# Altium PCB Standard_Gimbal_v2.0.PcbDoc
Units mil, origin at the board's own origin, x right, y up, seen from the top; angles counter-clockwise.
Board outline 2952.76 x 3787.4 mil, 2 copper layers (Top Layer, Bottom Layer); 62 components, 64 nets, 265 pads, 41 vias.
Unrouted connection lines stored in the file: 1.
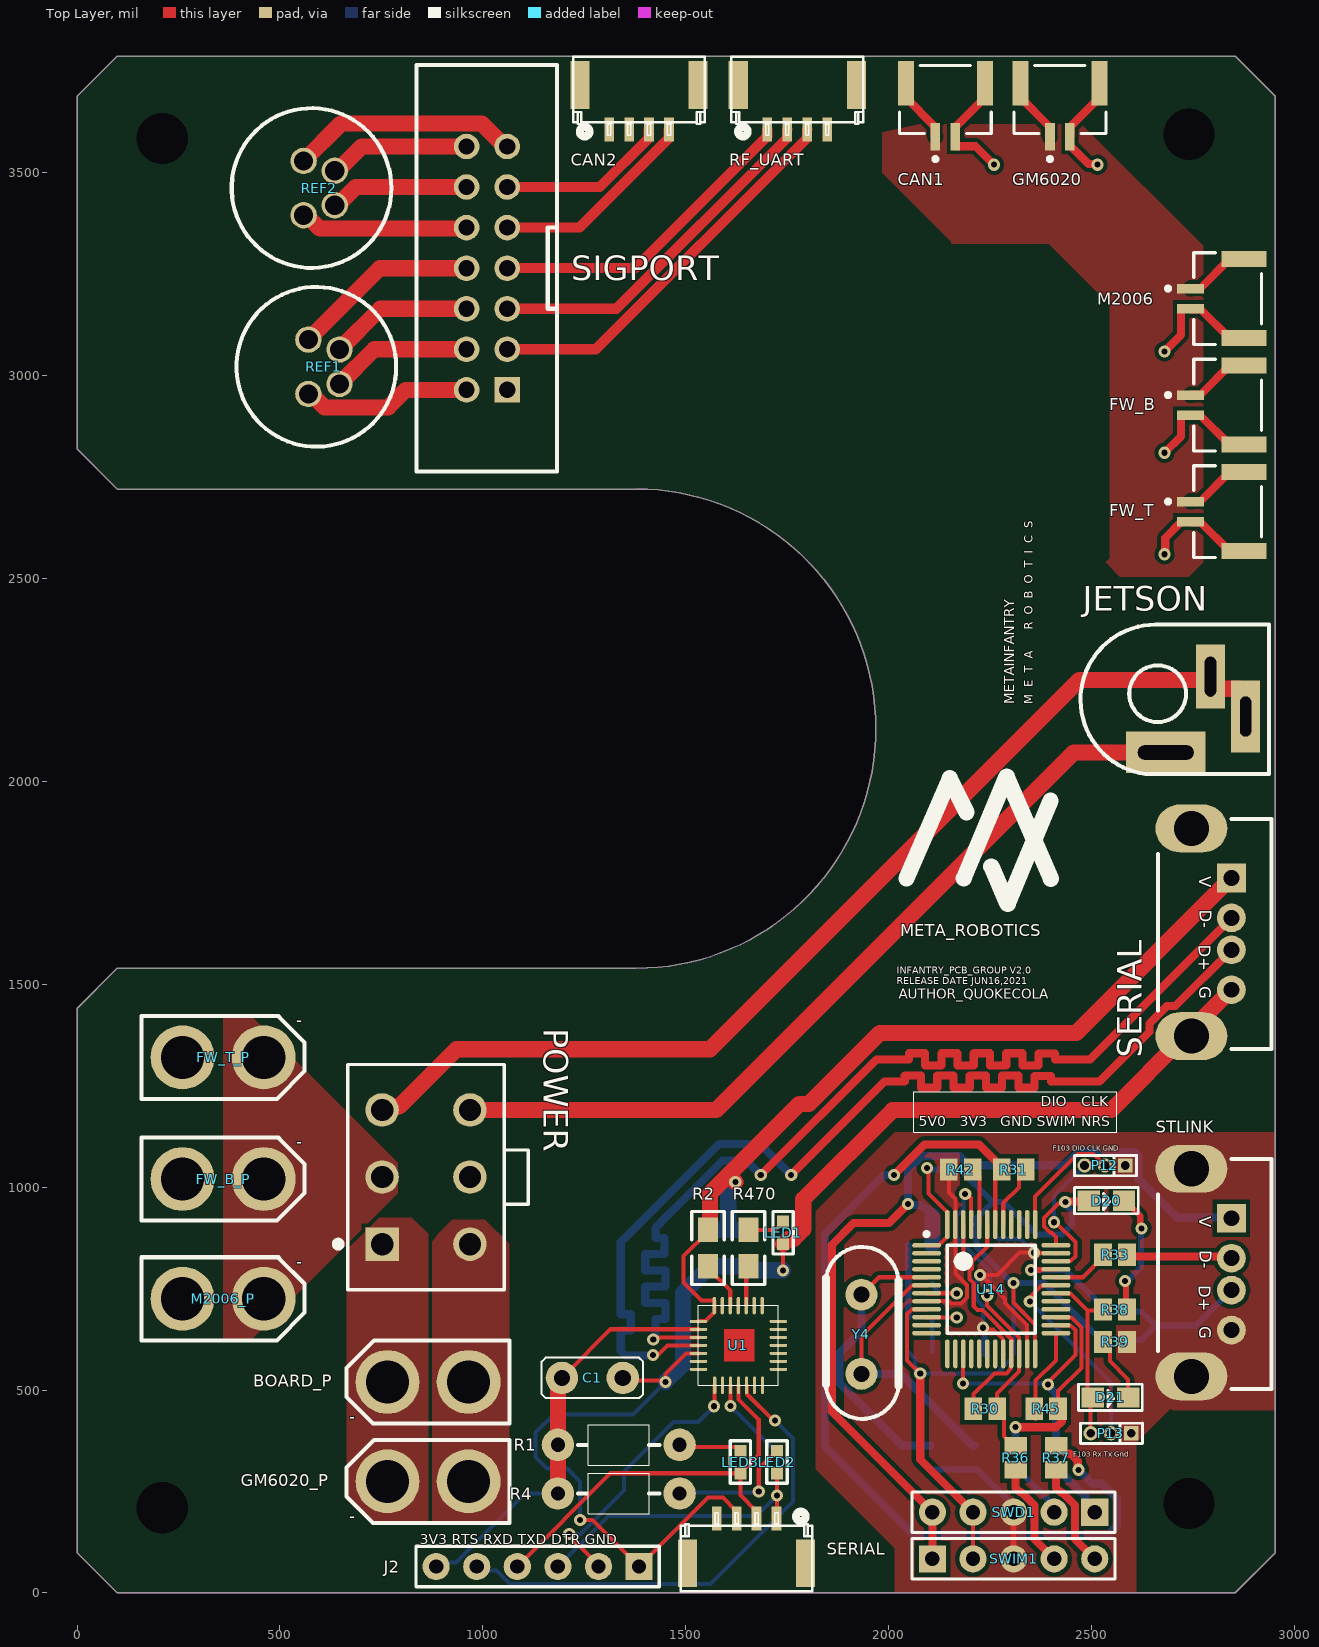
[diagram p0: Top Layer view]
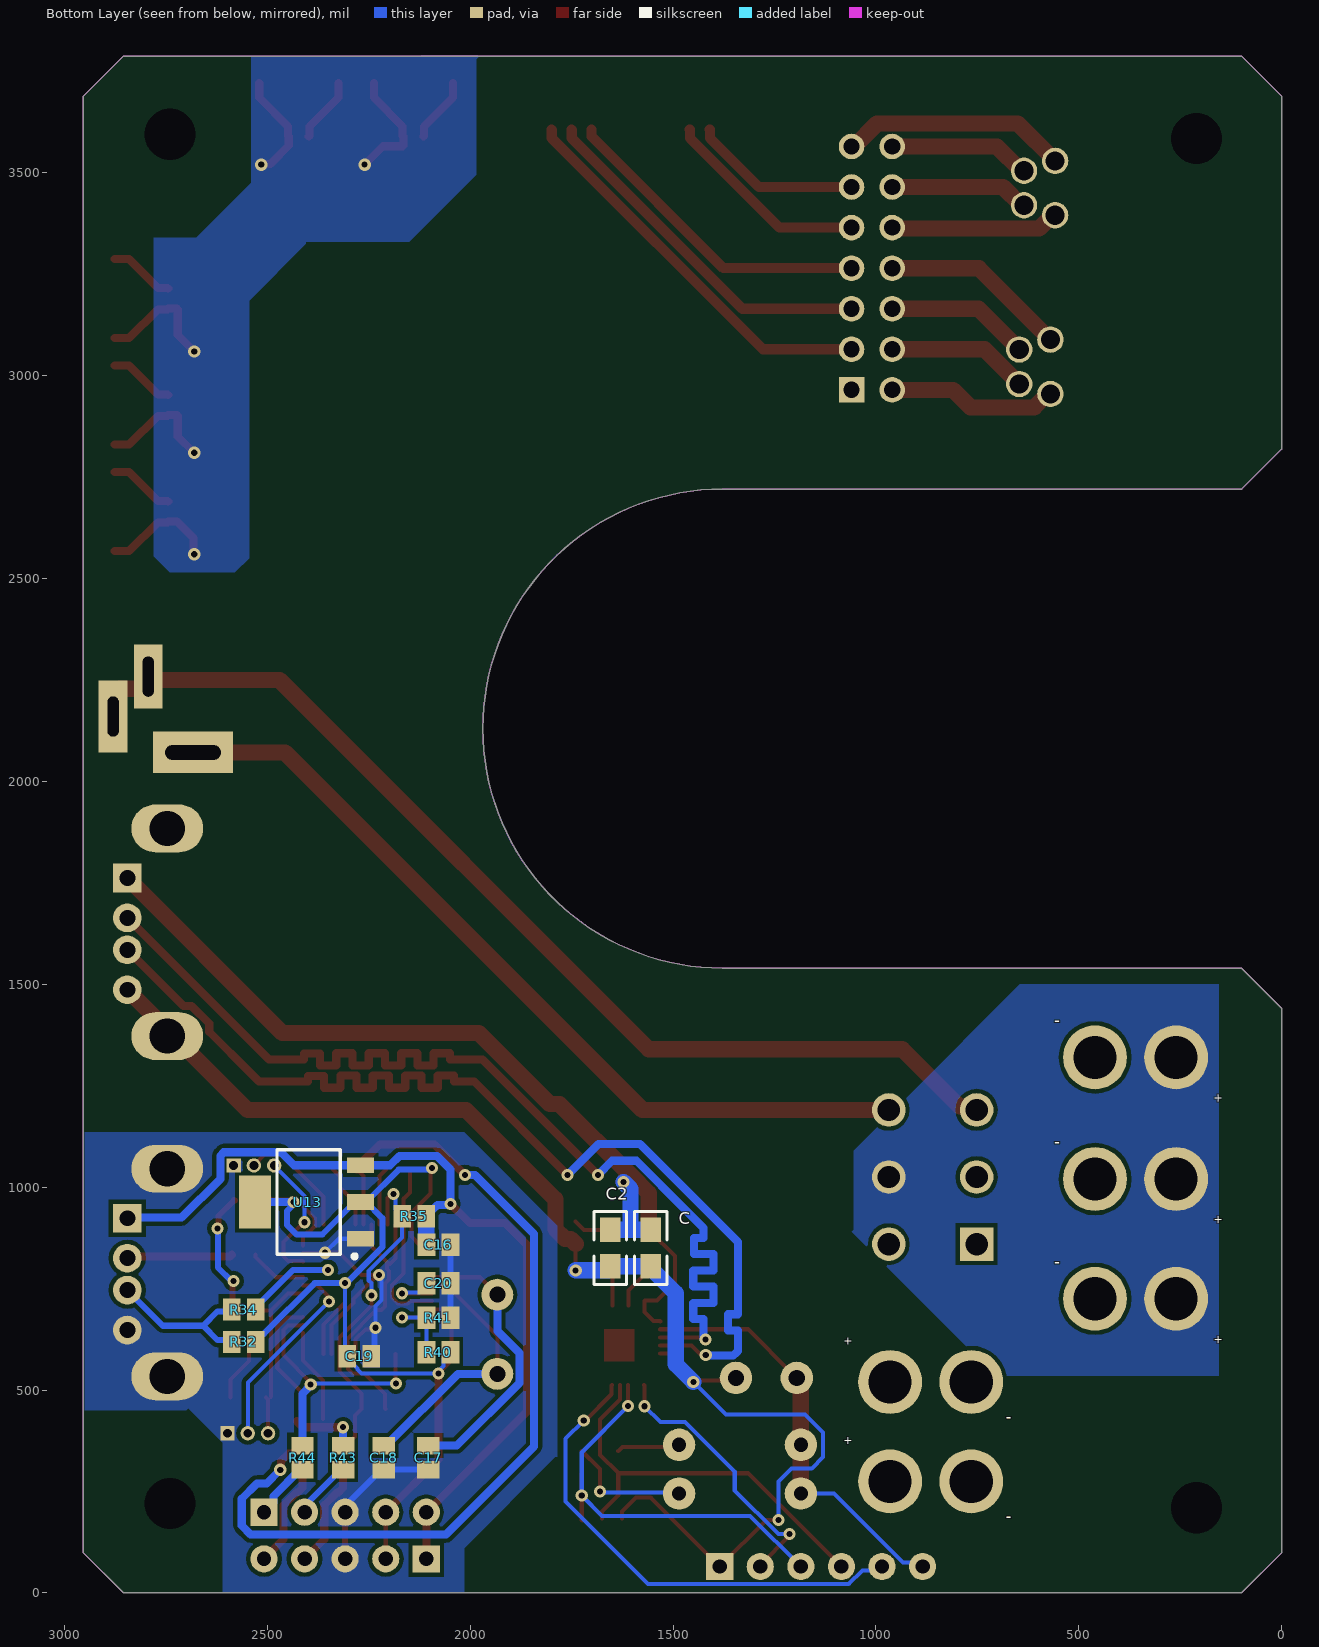
[diagram p1: Bottom Layer view, seen from below]

## Layer stack, top to bottom
Top Solder: solder mask 0.4, Solder Resist, Dk 3.5
Top Layer: signal copper 1.4
Dielectric 1: dielectric 12.6, FR-4, Dk 4.8
Bottom Layer: signal copper 1.4
Bottom Solder: solder mask 0.4, Solder Resist, Dk 3.5

## Board outline
0.25,98.68 0.25,1441.19 98.68,1539.62 1378.2,1539.62 ccw(c1378.2,2130.17) 1378.2,2720.72 98.68,2720.72 0.25,2819.15 0.25,3689.23 98.68,3787.65 2854.58,3787.65 2953.01,3689.23 2953.01,98.68 2854.58,0.25 98.68,0.25

## Design rules (kind name [scope] priority, off if disabled: settings)
Clearance [All] p1: gap=10 ignorepadtopadclearanceinfootprint=FALSE except(0: Arc-Hole Track-Hole SMDPad-Text SMDPad-Hole THPad-Text THPad-Hole Via-Text Via-Hole Fill-Text Fill-Hole Poly-Text Poly-Hole Region-Text Region-Hole Text-Text Text-Hole; 5: Arc-Arc Arc-Track Arc-THPad Arc-Via Arc-Text Track-Track Track-THPad Track-Via Track-Text SMDPad-SMDPad SMDPad-THPad SMDPad-Via THPad-THPad THPad-Via Via-Via; 7.5: Arc-SMDPad Track-SMDPad)
PlaneConnect [All] p1: planeconnectstyle=Direct reliefexpansion=20 reliefentries=4 reliefconductorwidth=10 reliefairgap=10
PolygonConnect [All] p1: connectstyle=Direct reliefconductorwidth=10 reliefentries=4 polygonreliefangle="90 Angle" airgapwidth=10
RoutingVias [All] p1: holewidth=28 width=50 viastyle="Through Hole" minholewidth=28 minwidth=50 maxholewidth=28 maxwidth=50
SolderMaskExpansion [All] p1: expansion=4 istentingtop=FALSE
Width [All] p1: maxlimit=40 minlimit=10 preferedwidth=20 minimp=50.000000 maximp=50.000000 favimp=50.000000
29 further rules are at their usual default settings.

## Components (designator, comment, footprint, x,y, rotation, side; value= is the part's Value field where it differs from the comment)
BOARD_P "XT PLUGIN" XT30-M 865,520 r180 top
C "Cap" 0805 1555,895 r270 bottom value=0.1uF
C1 "4.7" 2P-150 1270,530 r0 top value=1uF
C2 "Cap" 0805 1655,895 r270 bottom value=1uF
C16 "Cap" C0805 2078.11,858.47 r0 bottom value=104
C17 "Cap" C0805 2103.11,333.46 r90 bottom value=22p
C18 "Cap" C0805 2213.11,333.46 r90 bottom value=22p
C19 "Cap" C0805 2273.11,583.47 r0 bottom value=104
C20 "Cap" C0805 2078.11,763.47 r0 bottom value=104
CAN1 "CAN1" JST-BM02B-GHS-TBT_V 2140,3655 r0 top
CAN2 "gh1.25_4p" GH1.25-LS-4P 1385,3705 r180 top
D20 "LED" 0805_LED 2533.11,963.47 r0 top
D21 "LED" 0805_LED 2543.11,478.46 r0 top
FW_B "CAN1" JST-BM02B-GHS-TBT_V 2810,2927.5 r270 top
FW_B_P "XT PLUGIN" XT30-M 360,1020 r0 top
FW_T "CAN1" JST-BM02B-GHS-TBT_V 2810,2665 r270 top
FW_T_P "XT PLUGIN" XT30-M 360,1320 r0 top
GM6020 "CAN1" JST-BM02B-GHS-TBT_V 2422.44,3655 r0 top
GM6020_P "XT PLUGIN" XT30-M 865,275 r180 top
J2 "" HDR2.54-LI-6P 1135,65 r180 top
JETSON "DC_PowerPort" DC-012 2683.15,2071.42 r90 top
LED1 "Res2" 0603 1740,860 r90 top value=1K
LED2 "Res2" 0603 1725,295 r90 top value=1K
LED3 "Res2" 0603 1635,295 r90 top value=1K
M2006 "CAN1" JST-BM02B-GHS-TBT_V 2810,3190 r270 top
M2006_P "XT PLUGIN" XT30-M 360,725 r0 top
P12 "ST-LINK" SIP3-1.27 2533.11,1053.46 r0 top
P13 "串口1" SIP3-1.27 2548.11,393.46 r0 top
POWER "64900621122" 64900621122 860,1025 r270 top
R1 "Res2" R 1335,365 r0 top value=1K
R2 "Res2" 0805 1555,895 r270 top value=1K
R4 "Res2" R 1335,245 r0 top value=1K
R30 "RES" C0805 2238.11,453.46 r0 top value=1k
R31 "RES" C0805 2308.11,1043.46 r180 top value=1k
R32 "RES" C0805 2558.11,618.47 r180 bottom value=1.5k
R33 "RES" C0805 2558.11,833.47 r180 top value=22
R34 "RES" C0805 2558.11,698.47 r180 bottom value=22
R35 "RES" C0805 2138.11,928.47 r0 bottom value=1.5k
R36 "RES" C0805 2313.11,332.99 r90 top value=22
R37 "RES" C0805 2413.11,333.46 r90 top value=22
R38 "RES" C0805 2558.11,698.47 r180 top value=1.5k
R39 "RES" C0805 2558.11,618.47 r180 top value=1.5k
R40 "RES" C0805 2078.11,593.47 r180 bottom value=4.7k
R41 "RES" C0805 2078.11,678.47 r0 bottom value=4.7k
R42 "RES" C0805 2178.11,1043.46 r0 top value=10k
R43 "RES" C0805 2313.11,333.46 r90 bottom value=22
R44 "RES" C0805 2413.11,333.46 r90 bottom value=22
R45 "RES" C0805 2388.11,453.46 r180 top value=100
R470 "Res2" 0805 1655,805 r90 top value=1K
REF1 "Referee_Air" "M8 CONNECTOR-LS" 589.68,3021.93 r270 top
REF2 "Referee_Air" "M8 CONNECTOR-LS" 577.91,3462.48 r270 top
RF_UART "gh1.25 P4" GH1.25-LS-4P 1775,3705 r180 top
SERIAL "gh1.25_4p" GH1.25-LS-4P 1650,85 r0 top
SERIAL "4 HEADER" USB-A/S_D 2845,1762.17 r270 top
SIGPORT "XH2.54 14PIN" DC-2.54-L-Z-14P 1010,3265 r90 top
STLINK "USB" USB-A/S_D 2845,923.43 r270 top
SWD1 "Head5" HDR2.54-LI-5P 2308.11,198.94 r180 top
SWIM1 "Header 5" HDR2.54-LI-5P 2308.11,83.94 r0 top
U1 "CP2102" CP2102 1630,610 r90 top
U13 "AMS1117-XX" SOT_223 2398.11,963.47 r90 bottom
U14 "STM32F103C8T6" LQFP48_N 2253.11,748.47 r0 top
Y4 "XTAL" XTAL_2 1934.48,624.92 r90 top

## Footprints (in the part's own frame and the unit in brackets; to place one, negate y for a bottom-side part, rotate by r counter-clockwise, add the part's x,y. Pads: shape width x height; smd on the part's side, far side on the other; paste and mask are expansions set on the pad)
2P-150 [mil]
  round 80 hole 40: 1(-75,0) 2(75,0)
  silkscreen extent -125,-50 125,50
0603 [mil]
  rect 30x30 smd: 1(0,0) 2(55,0)
  silkscreen extent -25,-25 80,25
0805 [mil]
  rect 60x50 smd: 1(0,0) 2(90,0)
  silkscreen extent -45,-40 135,40
0805_LED [mm]
  rect 1.4x1.27 smd: 1(-1.011,0.083) 2(1.199,0.083)
  silkscreen extent -1.9,-0.74 2.09,0.91
64900621122 [mm] "4.20mm Male Dual Row Vertical Header, 6p"
  rect 2.1x2.1 hole 1.4: 1(4.2,-2.75)
  round 2.1 hole 1.4: 2(0,-2.75) 3(-4.2,-2.75) 4(4.2,2.75) 5(0,2.75) 6(-4.2,2.75)
  silkscreen extent -7.05,-5.7 7.05,6.4, body extent -6.95,-4.8 7.25,6.3, height 12.82
C0805 [mm] "Chip Capacitor, Body 2.0x1.3mm, IPC High Density"
  rect 1.1x1.4 smd: 1(-0.75,0) 2(0.75,0)
  body extent -1.1,-0.72 1.1,0.72, height 1.4
CP2102 [mm]
  oval 0.2x1.1 smd: 1(-1.499,2.502) 2(-0.999,2.502) 3(-0.499,2.502) 4(0.001,2.502) 5(0.501,2.502) 6(1.001,2.502) 7(1.501,2.502) 15(1.499,-2.502) 16(0.999,-2.502) 17(0.499,-2.502) 18(-0.001,-2.502) 19(-0.501,-2.502) 20(-1.001,-2.502) 21(-1.501,-2.502)
  oval 1.1x0.2 smd: 8(2.489,1.511) 9(2.489,1.011) 10(2.489,0.511) 11(2.489,0.011) 12(2.489,-0.489) 13(2.489,-0.989) 14(2.489,-1.489) 22(-2.489,-1.511) 23(-2.489,-1.011) 24(-2.489,-0.511) 25(-2.489,-0.011) 26(-2.489,0.489) 27(-2.489,0.989) 28(-2.489,1.489)
  Top Layer region: -1.016,-1.016 1.016,-1.016 1.016,0.889 -1.016,0.889
  silkscreen extent -2.5,-2.5 2.5,2.5
DC-2.54-L-Z-14P [mm] "立式直插简牛插座，间距2.54 淘宝ID:黄晶宝石   店铺网址:https://shop463601444.taobao.com"
  rect 1.6x1.6 hole 1.02: 1(-7.62,-1.27)
  round 1.6 hole 1.02: 2(-7.62,1.27) 3(-5.08,-1.27) 4(-5.08,1.27) 5(-2.54,-1.27) 6(-2.54,1.27) 7(0,-1.27) 8(0,1.27) 9(2.54,-1.27) 10(2.54,1.27) 11(5.08,-1.27) 12(5.08,1.27) 13(7.62,-1.27) 14(7.62,1.27)
  silkscreen extent -12.72,-4.4 12.72,4.4, body extent -12.72,-4.4 12.71,4.7, height 8.8
DC-012 [mm] "5.5*2.1                  淘宝ID:黄晶宝石"
  rect 2.6x5 hole 0.9 slot 3.5 at 90 deg: 1(0,0)
  rect 4.5x1.8 hole 0.7 slot 2.5 at 0 deg: 2(2.25,-5)
  rect 4x1.8 hole 0.7 slot 2.5 at 0 deg: 3(4.75,-2.8)
  silkscreen extent -1.35,-6.48 8,5.33, body extent -1.11,-6.47 7.89,4.53, height 13.6
GH1.25-LS-4P [mm] "A1257WR-S-4P"
  rect 1.2x3 smd: 0(-3.7,-0.3) 0(3.7,-0.3)
  rect 0.6x1.5 smd: 1(1.875,2.5) 2(0.625,2.5) 3(-0.625,2.5) 4(-1.875,2.5)
  silkscreen extent -4.13,-2.05 4.12,2.93, body extent -4.12,-2.15 4.12,2.25, height 4.2
HDR2.54-LI-5P [mm] "排针，5脚"
  rect 1.7x1.7 hole 0.9: 1(-5.08,0)
  round 1.7 hole 0.9: 2(-2.54,0) 3(0,0) 4(2.54,0) 5(5.08,0)
  silkscreen extent -6.35,-1.27 6.35,1.27, body extent -6.35,-1.27 6.35,1.27, height 8.5
HDR2.54-LI-6P [mm] "排针，6脚"
  rect 1.7x1.7 hole 0.9: 1(-6.35,0)
  round 1.7 hole 0.9: 2(-3.81,0) 3(-1.27,0) 4(1.27,0) 5(3.81,0) 6(6.35,0)
  silkscreen extent -7.62,-1.27 7.62,1.27, body extent -7.62,-1.27 7.62,1.27, height 8.5
JST-BM02B-GHS-TBT_V [mm] "Connector, 2-Leads, Body 5.75x4.25mm, Pitch 1.25mm"
  rect 0.6x1.7 smd: 1(-0.625,-1.675) 2(0.625,-1.675)
  rect 1x2.8 smd: MP1(-2.475,1.675) MP2(2.475,1.675)
  silkscreen extent -2.88,-3.2 2.88,2.78, body extent -2.88,-2.17 2.87,2.78, height 4.21
LQFP48_N [mm] "Thin QFP, 48-Leads, Body 7x7mm, Pitch 0.5mm, IPC Medium Density"
  oval 1.8x0.3 smd: 1(-4.05,2.75) 2(-4.05,2.25) 3(-4.05,1.75) 4(-4.05,1.25) 5(-4.05,0.75) 6(-4.05,0.25) 7(-4.05,-0.25) 8(-4.05,-0.75) 9(-4.05,-1.25) 10(-4.05,-1.75) 11(-4.05,-2.25) 12(-4.05,-2.75) 25(4.05,-2.75) 26(4.05,-2.25) 27(4.05,-1.75) 28(4.05,-1.25) 29(4.05,-0.75) 30(4.05,-0.25) 31(4.05,0.25) 32(4.05,0.75) 33(4.05,1.25) 34(4.05,1.75) 35(4.05,2.25) 36(4.05,2.75)
  oval 0.3x1.8 smd: 13(-2.75,-4.05) 14(-2.25,-4.05) 15(-1.75,-4.05) 16(-1.25,-4.05) 17(-0.75,-4.05) 18(-0.25,-4.05) 19(0.25,-4.05) 20(0.75,-4.05) 21(1.25,-4.05) 22(1.75,-4.05) 23(2.25,-4.05) 24(2.75,-4.05) 37(2.75,4.05) 38(2.25,4.05) 39(1.75,4.05) 40(1.25,4.05) 41(0.75,4.05) 42(0.25,4.05) 43(-0.25,4.05) 44(-0.75,4.05) 45(-1.25,4.05) 46(-1.75,4.05) 47(-2.25,4.05) 48(-2.75,4.05)
  silkscreen extent -4.17,-2.75 2.75,3.57, body extent -3.5,-3.5 3.5,3.5, height 1.6
"M8 CONNECTOR-LS" [mm]
  round 1.65 hole 1.2: 0(-1.08,1.45) 1(1.08,1.45) 2(-1.7,-0.5) 3(1.7,-0.5)
  silkscreen extent -5,-5 5,5, body extent 0,0 0,0, height 19.1
R [mil]
  round 80 hole 35: 1(-150,0) 2(150,0)
  silkscreen extent -100,-50 100,50
SIP3-1.27 [mm]
  rect 0.9x0.9 hole 0.55: 1(1.27,0)
  round 0.9 hole 0.55: 2(0,0) 3(-1.27,0)
  silkscreen extent -1.91,-0.64 1.97,0.64
SOT_223 [mm]
  rect 1x1.7 smd: 1(-2.3,-3.25) 2(0,-3.25) 3(2.3,-3.25)
  rect 3.3x2 smd: 2(0,3.349)
  silkscreen extent -3.53,-3 3.28,1.98, body extent -3.25,-3.51 3.25,3.51, height 1.93
USB-A/S_D [mm] "A型直插母头，"
  oval 3x4.5 hole 2.2: 1(-3.1,-2.5) 1(9.9,-2.5)
  round 1.8 hole 1: 1(7,0) 2(4.5,0) 3(2.5,0)
  rect 1.8x1.8 hole 1: 4(0,0)
  silkscreen extent -3.7,-4.6 10.7,2.5, body extent -3.71,-4.6 10.69,2.5, height 14
XT30-M [mm]
  round 4 hole 2.7: 1(-2.54,0) 2(2.54,0)
  silkscreen extent -5.1,-2.6 5.11,2.6, body extent -5.18,-2.8 5.02,2.8, height 10.66
XTAL_2 [mm]
  round 2 hole 1: 1(-2.157,0.035) 2(2.796,0.035)
  silkscreen extent -4.98,-2.3 5.79,2.27, body extent -5.29,-2.36 6.06,2.29, height 3.5

## Part data
C C2: "Capacitor", LatestRevisionDate=17-Jul-2002, LatestRevisionNote="Re-released for DXP Platform.", PackageReference=RAD-0.3, Published=8-Jun-2000, Publisher="Altium Limited"
C1: library part "Cap Pol1", "Polarized Capacitor (Radial)", LatestRevisionDate=17-Jul-2002, LatestRevisionNote="Re-released for DXP Platform.", PackageReference=RB7.6-15, Published=8-Jun-2000, Publisher="Altium Limited"
CAN1 FW_B FW_T GM6020 M2006: library part CMP-2000-05957-1, "Disconnectable Crimp Style Connector, Pitch 1.25 mm, 1 x 2 Position, Height 4.05 mm, -25 to 85 degC, RoHS, Tape and Reel", Color=Natural, Manufacturer=JST-Sales-America-Inc., Package Description="Disconnectable Crimp Style Connector, Pitch 1.25 mm, 1 x 2 Position, Height 4.05 mm", Package Reference=BM02B-GHS-TBT, Category=Connectors,Interconnects, Connector Type=Header,Shrouded, Contact Finish=Tin, Contact Finish Thickness=-, Contact Mating Length=-, Contact Type=OuterShroudContact, Datasheet URL=http://www.jst-mfg.com/product/pdf/eng/eGH.pdf, Datasheet Version=05/2016, Family=RectangularConnectors-Headers,MalePins, Fastening Type=LockingRamp, Features=SolderRetention, Manufacturer URL=http://www.jst.com/home2.html, Mounting Technology=SurfaceMount, Mounting Type=SurfaceMount, Number of Positions=2, Number of Positions Loaded=All, Number of Rows=1, Packaging=Digi-Reel®, Pitch="0.049\"(1.25mm)", Row Spacing=-, Series=GH, Termination=Solder
J2: library part CON6, "Connector"
LED1 LED2 LED3 R1 R2 R4 R470: "Resistor", LatestRevisionDate=17-Jul-2002, LatestRevisionNote="Re-released for DXP Platform.", PackageReference=AXIAL-0.4, Published=8-Jun-2000, Publisher="Altium Limited"
P12 P13: library part "Header 3", "Header, 3-Pin", LatestRevisionDate=17-Jul-2002, LatestRevisionNote="Re-released for DXP Platform.", Publisher="Altium Limited"
POWER: library part CMP-1502-00495-1, "THT Male Header WR-MPC4, Vertical, Dual Row, pitch 4.2 mm, 6 pins", Contact Resistance=10mOhm, Manufacturer="Wurth Elektronik", Operating Temperature=-40to105degC, Working Voltage=600VAC, Datasheet URL=https://katalog.we-online.de/em/datasheet/6490xx21122.pdf, Gender=Male, Manufacturer URL=http://www.we-online.de, Mounting Technology=THT, Orientation=Vertical, Package Reference=64900621122, Packaging=Tray, Part Number=64900621122, Pin Number=6, Pitch=4.2mm, Publisher=WurthElektronik
SERIAL: "4 Pin Header"
STLINK: library part USB_G
SWD1: library part "HEAD 5"
SWIM1: "Header, 5-Pin", LatestRevisionDate=17-Jul-2002, LatestRevisionNote="Re-released for DXP Platform.", Publisher="Altium Limited"
U1: library part Component_2
U13: "AMS   800mA LOW DROPOUT VOLTAGE REGULATOR"
U14: "STM32 ARM-based 32-bit MCU with 64 Kbytes Flash, 48-pin LQFP, Industrial Temperature", ComponentLink1Description="Manufacturer Link", ComponentLink1URL=www.st.com/stm32, ComponentLink2Description=Datasheet, ComponentLink2URL=http://www.st.com/stonline/products/literature/ds/13587.pdf, DatasheetVersion="rev6, Mar-2008", PackageDescription="48-Pin Low-Profile Quad Flat Pack, 7 x 7 mm Body, 0.5 mm Pitch (LQFP48)", PackageReference=LQFP48, PackageVersion=Mar-2008, Published=30-May-2008, Publisher="Altium Limited"

## Free pads (board coordinates)
  round 0 hole 125.98: ""(210,210) ""(210,3585) ""(2740,220) ""(2740,3595)

## Via types
v1: diameter 30, hole 15, Top Layer to Bottom Layer, 41 vias

## Nets (pads, with @x,y where several pads share a name; then routed paths per layer and width w, separated by ;. In a path a pad name is that pad's centre, name@x,y a point inside that pad or via, vN(x,y) a via of type N, cw(c..) or ccw(c..) an arc to the next point about the centre after c; other vN are vias at no path point)
3.3: C1.1 J2.6 R1.1 R4.1 U1.6 | length 1061.8
  Top Layer w10: C1.1@1185,540 1205,540 1314.87,649.87 1531.06,649.87 U1.6
  Top Layer w40: R4.1 R1.1 C1.1@1185,540
  Bottom Layer w10: J2.6 894.93,74.93 933.46,74.93 1103.53,245 R4.1
3V3: C19.2 D20.1 R32.2 R40.2 SWD1.4 SWIM1.2 U13.2 U14.1 U14.9 U14.24 U14.36 U14.48 | length 3006.1
  Top Layer w10: v1(2078.11,540.75) 2045.73,573.13 2045.73,687.19 2057.44,698.91 2093.31,698.91 U14.9 ; U14.1 2123.19,856.73 2144.84,878.39 U14.48 2144.84,937.44 2098.11,984.17 2098.11,1043.46 v1(2094.39,1047.18) ; SWIM1.2 SWD1.4 ; v1(2308.11,763.47) 2308.11,715.18 2361.37,661.91 U14.24 ; U14.36 2412.55,877.64 2401.73,888.47 2397.75,888.47 2383.11,903.11 2383.11,923.82 2418.92,959.64 2431.78,959.64 v1(2435.61,963.47)
  Top Layer w20: v1(2078.11,540.75) 2078.11,328.94 SWD1.4 ; v1(2435.61,963.47) 2437.24,965.1 2491.66,965.1 D20.1
  Bottom Layer w10: R40.2 2065.23,576.81 2065.23,559.03 2078.11,546.16 v1(2078.11,540.75) 2267.75,540.75 2277.73,550.73 2277.73,552.66 2302.63,577.56 C19.2 2308.11,588.94 v1(2308.11,763.47)
  Bottom Layer w15: v1(2094.39,1047.18) 2098.11,1043.46 2176.38,1043.46 U13.2@2256.38,963.47 ; v1(2435.61,963.47) 2435.61,956.91 2451.89,940.62 2451.89,907.25 2428.11,883.47 2363.93,883.47 2283.93,963.47 2270.15,963.47 U13.2@2256.38,963.47 ; R32.2 2528.58,624.37 2514.43,638.52 2508.52,638.52 2383.58,763.47 v1(2308.11,763.47) 2305.24,763.47 2216.38,852.33 2216.38,923.47 U13.2@2256.38,963.47
  Bottom Layer w20: v1(2435.61,963.47) U13.2@2529.95,963.47
5V0: C16.2 R35.1 STLINK.4 SWD1.5 SWIM1.1 U13.3 | length 2273
  Top Layer w20: v1(2048.11,958.47) 2000.91,911.27 1914.02,911.27 1860,857.25 1860,447.04 SWD1.5 SWIM1.1
  Bottom Layer w20: R35.1 2108.58,934.37 2096.93,946.02 2091.02,946.02 2080.49,956.55 2050.02,956.55 v1(2048.11,958.47) 2048.11,1043.32 2081.97,1077.18 2174.48,1077.18 2197.64,1054.02 U13.3 2434.25,1054.02 2466.41,1086.18 2608.11,1086.18 2608.11,1085.11 2615.82,1077.39 2615.82,1020.36 2711.18,925 2843.43,925 STLINK.4
  Bottom Layer w40: C16.2 2108.11,858.94 2108.11,927.99 R35.1
(NRS): R37.1 SWIM1.5 | length 261.3
  Top Layer w20: R37.1 2413.11,259.12 2424.82,247.4 2428.18,247.4 2459.64,215.94 2459.64,132.4 SWIM1.5
(SWCLK): R44.1 SWD1.1 | length 147.8
  Bottom Layer w20: R44.1 2419.01,303.94 2484.64,238.31 2484.64,222.4 SWD1.1
(SWDIO): R43.1 SWD1.2 | length 147.8
  Bottom Layer w15: R43.1 2319.01,303.94 2398.17,224.78 2398.17,208.87 SWD1.2
(SWIM): R36.1 SWIM1.4 | length 260.8
  Top Layer w20: R36.1 2313.11,259.12 2324.82,247.4 2328.18,247.4 2359.64,215.94 2359.64,132.4 SWIM1.4
AMMO_DC: FW_B_P.1 FW_T_P.1 M2006_P.1 POWER.5
AMMO_GND: FW_B_P.2 FW_T_P.2 M2006_P.2 POWER.2
BOOT0: R42.2 U14.44 | length 142.2
  Top Layer w10: R42.2 2223.58,1027.52 U14.44
CAN1_H: CAN1.2 CAN1.MP2 FW_B.2 FW_B.MP2 FW_T.2 FW_T.MP2 GM6020.2 GM6020.MP2 M2006.2 M2006.MP2 | length 1452.5
  Top Layer w20: CAN1.MP2 2237.44,3685.51 2166.42,3614.49 2166.42,3590.87 CAN1.2 2164.61,3567.4 2166.42,3565.59 2214.41,3565.59 v1(2260,3520) ; v1(2515,3520) 2513.09,3521.91 2492.54,3521.91 2447.05,3567.4 GM6020.2 2448.86,3590.87 2448.86,3614.49 2519.88,3685.51 GM6020.MP2 ; v1(2680,2560) 2681.91,2561.91 2681.91,2599.91 2722.4,2640.39 FW_T.2 2745.87,2638.58 2769.49,2638.58 2840.51,2567.56 FW_T.MP2 ; v1(2680,2810) 2720.59,2850.59 2720.59,2901.08 2722.4,2902.89 FW_B.2 2745.87,2901.08 2769.49,2901.08 2840.51,2830.06 FW_B.MP2 ; v1(2680,3060) 2720.59,3100.59 2720.59,3163.58 2722.4,3165.39 M2006.2 2745.87,3163.58 2769.49,3163.58 2840.51,3092.56 M2006.MP2
CAN1_L: CAN1.1 CAN1.MP1 FW_B.1 FW_B.MP1 FW_T.1 FW_T.MP1 GM6020.1 GM6020.MP1 M2006.1 M2006.MP1 | length 810.3
  Top Layer w20: CAN1.MP1 2042.56,3685.51 2113.58,3614.49 2113.58,3590.87 CAN1.1 ; GM6020.MP1 2325,3685.51 2396.02,3614.49 2396.02,3590.87 GM6020.1 ; FW_T.1 2745.87,2691.42 2769.49,2691.42 2840.51,2762.44 FW_T.MP1 ; FW_B.1 2745.87,2953.92 2769.49,2953.92 2840.51,3024.94 FW_B.MP1 ; M2006.1 2745.87,3216.42 2769.49,3216.42 2840.51,3287.44 M2006.MP1
CAN2_H: CAN2.3 SIGPORT.11 | length 420.2
  Top Layer w25: SIGPORT.11 1288.44,3465 1408.92,3585.48 1408.92,3605.89 CAN2.3
CAN2_L: CAN2.4 SIGPORT.9 | length 510.8
  Top Layer w25: SIGPORT.9 1237.65,3365 1458.13,3585.48 1458.13,3605.89 CAN2.4
D+: SERIAL.2@2845,1585 U1.4 | length 2672.4
  Top Layer w10: v1(1419.31,586.16) 1423.84,586.16 1425,585 1430,585 1455.06,610.06 U1.4
  Top Layer w20: v1(1760,1030) 1990,1260 2030,1260 2040,1260 2040,1275 2080,1275 2080,1245 2120,1245 2120,1275 2160,1275 2160,1245 2200,1245 2200,1275 2240,1275 2240,1245 2280,1245 2280,1275 2320,1275 2320,1245 2360,1245 2360,1274.09 2400,1274.09 2400,1260 2520,1260 2540,1280 2642.99,1382.99 2642.99,1403.08 2686.37,1446.46 2706.46,1446.46 SERIAL.2@2845,1585
  Bottom Layer w20: v1(1419.31,586.16) 1419.31,585 1351.72,585 1345,591.72 1340,596.72 1340,646.72 1364.52,646.72 1364.52,686.72 1340,686.72 1340,865 1355,880 1581.72,1106.72 1683.28,1106.72 v1(1760,1030)
D-: SERIAL.3@2845,1663.74 U1.5 | length 2672.9
  Top Layer w10: v1(1420.11,624.87) 1425.28,624.87 1430.15,629.74 U1.5
  Top Layer w20: v1(1685,1030) 1970,1315 2040,1315 2050,1315 2050,1330 2090,1330 2090,1300 2130,1300 2130,1330 2170,1330 2170,1300 2210,1300 2210,1330 2250,1330 2250,1300 2290,1300 2290,1330 2330,1330 2330,1300 2370,1300 2370,1329.34 2410,1329.34 2410,1315 2490,1315 2496.26,1315 SERIAL.3@2845,1663.74
  Bottom Layer w20: v1(1420.11,624.87) 1425.28,624.87 1425.28,674.87 1450.28,674.87 1450.28,714.87 1400.28,714.87 1400.28,754.87 1450.28,754.87 1450.28,794.87 1400.28,794.87 1400.28,834.87 1448.06,834.87 1448.06,874.87 1425.28,874.87 1425.28,899.78 1455.5,930 1470.5,945 1590.5,1065 1650,1065 v1(1685,1030)
DTR: J2.2 U1.28 | length 676.9
  Top Layer w10: v1(1212.98,145) 1212.98,141.01 1285,68.99 J2.2 ; v1(1570,460) 1570.69,460.69 1570.69,511.31 U1.28
  Bottom Layer w10: v1(1212.98,145) 1240.36,145 1347.97,252.62 1347.97,298.68 1470.23,420.94 1530.94,420.94 v1(1570,460)
GMB_DC: BOARD_P.1 GM6020_P.1 POWER.4
GMB_GND: BOARD_P.2 GM6020_P.2 POWER.1
GND: C1.2 C2.2 C.2 J2.1 LED1.1 SERIAL.1@2746.57,1372.4 SERIAL.1@2746.57,1884.21 SERIAL.1@2845,1486.57 SERIAL.3@1625.39,183.43 U1.3 | length 3421.3
  Top Layer w10: v1(1240,180) 1270,180 J2.1 1555,235 1591.54,235 1625.39,201.14 SERIAL.3@1625.39,183.43 ; C1.2 1351.17,523.83 1446.17,523.83 v1(1450,520) 1450,539.23 1500.96,590.19 1531.32,590.19 U1.3 ; v1(1740,795) LED1.1
  Top Layer w40: LED1.1 1752.5,872.5 1766.39,872.5 1790,896.11 1790,970 2010,1190 2548.43,1190 2734.02,1375.59 SERIAL.1@2845,1486.57
  Bottom Layer w10: v1(1240,180) 1240,275 1208.09,306.91 1158.09,306.91 1130,335 1130,395 1175,440 1370,440 v1(1450,520)
  Bottom Layer w40: v1(1450,520) 1493.43,563.43 1493.43,738.43 1555,800 C.2 C2.2 1655,800 1660,795 v1(1740,795)
GNDG: C16.1 C17.1 C18.1 C19.1 C20.1 P12.1 P13.1 R39.1 R41.1 R42.1 STLINK.1 SWD1.3 SWIM1.3 U13.1 U14.8 U14.20 U14.23 U14.35 U14.47 | length 1859.5
  Top Layer w10: U14.8 2148.33,718.94 2153.81,713.47 2178.46,713.47 2193.11,728.11 2193.11,758.79 2164.52,787.37 U14.47 2164.52,971.45 2148.58,987.39 R42.1 ; v1(2225,783.47) v1@2228.46,783.47 ; v1(2233.11,653.47) 2236.93,649.64 2257.88,649.64 2282.29,625.23 2282.29,589.36 U14.20 ; U14.23 2341.69,660.38 2287.48,714.6 2287.48,724.45 v1@2228.46,783.47 ; U14.35 2412.21,837.39 2359.18,837.39 v1(2358.11,838.47) 2323.11,838.47 2268.11,783.47 v1@2228.46,783.47
  Top Layer w15: SWIM1.3 SWD1.3
  Bottom Layer w10: v1(2225,783.47) 2225,778.05 2218.11,771.16 2218.11,722.52 2233.11,707.52 v1(2233.11,653.47) ; U13.1 2323.66,872.91 v1(2358.11,838.47)
  Bottom Layer w15: R41.1 C20.1 C16.1 ; C17.1 C18.1 2219.01,303.94 2298.17,224.78 2298.17,208.87 SWD1.3 ; v1(2233.11,653.47) 2235.98,650.6 2235.98,591.07 C19.1
MPC_DC: JETSON.1 POWER.6 | length 2079.8
  Top Layer w40: POWER.6 1575.35,1190.35 2456.42,2071.42 JETSON.1
MPC_GND: JETSON.2 JETSON.3 POWER.3 | length 2635.6
  Top Layer w40: POWER.3 759.9,1198.52 793.52,1198.52 935,1340 1560,1340 2470,2250 2784.96,2250 2806.38,2228.58 2864.57,2228.58 2880,2213.15 JETSON.2
NetC20_2: C20.2 U14.7 | length 148.8
  Top Layer w10: U14.7 2093.74,738.54 2168.03,738.54 v1(2168.11,738.47)
  Bottom Layer w10: C20.2 2107.63,757.56 2124.29,740.91 2165.67,740.91 v1(2168.11,738.47)
NetD20_2: D20.2 R38.1 | length 328.4
  Top Layer w15: D20.2@2582.04,968.47 D20.2 2582.86,966.73 2620.24,929.35 2620.24,901.34 v1(2623.11,898.47) ; v1(2583.11,768.47) 2585.37,766.2 2585.37,700.73 R38.1 2592.63,693.47 R38.1@2602.63,703.47
  Bottom Layer w15: v1@2588.11,768.47 2621.67,802.03 v1@2621.67,899.9
NetD21_2: D21.2 R39.2 | length 162.3
  Top Layer w10: R39.2 2545.23,601.81 2545.23,571.35 2590.3,526.28 D21.2
NetLED1_2: LED1.2 R470.2 | length 93.3
  Top Layer w10: R470.2 1720,895 LED1.2
NetLED2_2: LED2.2 R4.2 | length 315.7
  Top Layer w10: v1(1680,250) 1680,305 LED2.2
  Bottom Layer w10: R4.2 1487.5,247.5 1677.5,247.5 v1(1680,250)
NetLED3_2: LED3.2 R1.2 | length 156.2
  Top Layer w10: R1.2 1490,360 1625,360 LED3.2
NetR2_2: R2.2 U1.10 | length 119.7
  Top Layer w10: R2.2 1555,800 1609.87,745.13 U1.10
NetR32_1: R32.1 R34.1 STLINK.2 | length 383.5
  Bottom Layer w15: R32.1@2592.53,623.36 2623,623.36 2658.11,658.47 ; R34.1@2592.53,693.57 2623,693.57 2658.11,658.47 ; STLINK.2 2757.21,658.47 2658.11,658.47
NetR33_1: R33.1 STLINK.3 | length 260.9
  Top Layer w20: R33.1 2591.87,829.23 2840.77,829.23 STLINK.3
NetR40_1: R40.1 R41.2 U14.10 | length 220.4
  Top Layer w10: U14.10 2094.01,679.22 2167.35,679.22 v1(2168.11,678.47)
  Bottom Layer w10: R40.1 R41.2 v1(2168.11,678.47)
OS_IN: C17.2 U14.5 Y4.2 | length 706.8
  Top Layer w10: Y4.2 1976.1,777.99 U14.5
  Bottom Layer w20: Y4.2 1933.11,645.48 1878.74,591.11 1878.74,517.48 2033.22,362.99 C17.2
OS_OUT: C18.2 U14.6 Y4.1 | length 659.1
  Top Layer w10: Y4.1 1933.11,633.63 2057.44,757.96 2093.31,757.96 U14.6
  Bottom Layer w20: Y4.1 2030.19,540 2207.2,362.99 C18.2
REFEREE_A1: REF1.0 SIGPORT.6 | length 354.9
  Top Layer w40: REF1.0 747.32,3165 SIGPORT.6
REFEREE_A2: REF1.1 SIGPORT.4 | length 348.7
  Top Layer w40: REF1.1 732.36,3065 SIGPORT.4
REFEREE_A3: REF1.2 SIGPORT.8 | length 463
  Top Layer w40: REF1.2 746.14,3265 SIGPORT.8
REFEREE_A4: REF1.3 SIGPORT.2 | length 421.5
  Top Layer w40: REF1.3 576.75,2955 609.83,2921.93 766.83,2921.93 809.91,2965 SIGPORT.2
REFEREE_B1: REF2.0 SIGPORT.14 | length 349.9
  Top Layer w40: REF2.0 641.75,3505 701.75,3565 SIGPORT.14
REFEREE_B2: REF2.1 SIGPORT.12 | length 343.7
  Top Layer w40: REF2.1 641.75,3419.96 686.79,3465 SIGPORT.12
REFEREE_B3: REF2.2 SIGPORT.13 | length 563.3
  Top Layer w40: REF2.2 650.32,3621.5 997.28,3621.5 1053.78,3565 SIGPORT.13
REFEREE_B4: REF2.3 SIGPORT.10 | length 416.5
  Top Layer w40: REF2.3 564.98,3395.55 598.05,3362.48 957.48,3362.48 SIGPORT.10
RTS: J2.5 U1.24 | length 1219.3
  Top Layer w10: U1.24 1651.19,510.94 1651.19,489.66 1715.85,425 v1(1720,425)
  Bottom Layer w10: J2.5 994.93,55.07 1033.46,55.07 1067,21.54 1561.54,21.54 1765,225 1765,380 v1(1720,425)
RX: D21.1 P13.3 R38.2 U14.30 | length 437.7
  Top Layer w10: U14.30 2412.9,738.28 2448.77,738.28 2490.49,696.56 ; D21.1@2490.49,483.46 2490.49,696.56 ; P13.3 2498.11,476.54 D21.1 ; R38.2 2526.67,696.56 2490.49,696.56
RXD: J2.4 LED3.1 SERIAL.2@1674.61,183.43 U1.25 | length 1029.4
  Top Layer w10: J2.4 1315,295 LED3.1 ; U1.25 1630.44,476.43 1680,426.87 1680,340 LED3.1 ; SERIAL.2@1674.61,183.43 1674.61,201.14 1635,240.75 LED3.1
SUS: R470.1 U1.12 | length 99.4
  Top Layer w10: U1.12 1649.24,799.24 R470.1
SWCLK1: P12.2 U14.37 | length 295.3
  Top Layer w10: U14.37 2361.37,976.73 2465.82,1081.18 2505.39,1081.18 P12.2
SWDIO1: P12.3 U14.34 | length 331.7
  Top Layer w10: v1(2408.11,913.47) 2411.38,913.47 2460.49,864.36 2460.49,829.42 2448.77,817.71 2412.9,817.71 U14.34
  Bottom Layer w10: v1(2408.11,913.47) 2408.11,978.47 P12.3
SWIM: R30.2 R35.2 R36.2 U14.22 U14.45 | length 828.5
  Top Layer w10: v1(2188.88,983.47) 2193.11,983.47 2203.55,973.02 2203.55,908.26 U14.45 ; v1(2243.11,733.47) 2243.11,708.47 2321.66,629.91 2321.66,589.36 U14.22 2322,545.5 2267.63,491.13 R30.2 2284.29,436.81 2284.29,385.43 2307.2,362.52 R36.2
  Bottom Layer w10: v1(2188.88,983.47) 2188.88,978.05 2184.29,973.47 2184.29,945.12 R35.2 2167.63,876.19 2250,793.82 2250,769.8 2243.67,763.47 2243.67,734.03 v1(2243.11,733.47)
SWIM_IN: R30.1 U14.21 U14.43 U14.46 | length 691.6
  Top Layer w10: U14.46 2184.21,823.99 2197.49,810.71 2200,810.71 2205,815.71 ; R30.1 2209.81,454.69 2209.81,490.17 2260.73,541.08 2290.26,541.08 2301.04,551.87 2301.04,557.72 2302.32,559 2302.32,619.03 2303.6,620.32 2303.6,625.14 2231.7,697.03 2219.18,697.03 2210,706.22 2210,763.11 2200,773.11 2200,793.82 2205,798.82 2205,815.71 ; U14.43 2243.26,853.98 2205,815.71
SWIM_RST: R31.2 R37.2 U14.42 | length 2322.6
  Top Layer w10: U14.42 2262.95,1027.84 R31.2
  Top Layer w20: v1(2013.11,1030) 2088.11,1105 2222.95,1105 2278.58,1049.37 R31.2 ; R37.2 2419.01,362.99 2438.91,343.09 2447.91,343.09 2466.19,324.81 2466.19,305.38 v1(2468.11,303.46)
  Bottom Layer w20: v1(2013.11,1030) 1988.11,1030 1843.11,885 1843.11,360.65 2059.82,143.94 2541.25,143.94 2563.11,165.79 2563.11,232.08 2525.1,270.08 2501.49,270.08 v1(2468.11,303.46)
SWIM_RST_IN: R31.1 U14.41 | length 158.3
  Top Layer w10: U14.41 2282.63,960.42 2320.98,998.76 2320.98,1026.81 R31.1
T_JTCK: R44.2 U14.15 U14.26 | length 658.8
  Top Layer w10: v1(2183.11,515.75) 2183.11,518.47 2183.86,519.22 2183.86,588.67 U14.15 ; v1(2393.11,513.47) 2393.11,518.47 2460.49,585.85 2460.49,647.82 2448.77,659.54 2412.9,659.54 U14.26
  Bottom Layer w10: v1(2183.11,515.75) 2183.33,515.97 2390.61,515.97 v1(2393.11,513.47)
  Bottom Layer w20: v1(2393.11,513.47) 2393.11,510.76 2413.11,490.76 R44.2
T_JTMS: R43.2 R45.1 U14.27 | length 464.2
  Top Layer w10: U14.27 2412.9,679.22 2450.3,679.22 2475.49,654.03 2475.49,554.63 2418.11,497.25 R45.1@2418.11,453.46
  Top Layer w20: v1(2313.11,408.46) 2313.17,408.41 2413.05,408.41 2427.16,422.52 2427.16,423.46
  Bottom Layer w20: R43.2 v1(2313.11,408.46)
T_SWDIO_IN: R45.2 U14.25 | length 231.9
  Top Layer w10: R45.2@2362.55,429.02 2362.55,523.27 2412.55,573.27 U14.25
TX: P13.2 U14.31 | length 495.4
  Top Layer w10: v1(2348.11,718.47) 2351.93,722.29 2351.93,733.56 2376.34,757.96 2412.21,757.96 U14.31
  Bottom Layer w10: v1(2348.11,718.47) 2548.11,518.47 P13.2
TXD: J2.3 LED2.1 SERIAL.1@1723.82,183.43 U1.26 | length 1048.5
  Top Layer w10: v1(1610.76,460.76) U1.26 ; SERIAL.1@1723.82,178.78 1725,179.96 v1(1725,240) LED2.1
  Bottom Layer w10: J2.3 1310,190 1675,190 v1(1725,240) 1725,346.52 v1(1610.76,460.76)
UART_GND: RF_UART.3 SIGPORT.3 | length 975.9
  Top Layer w25: SIGPORT.3 1278.44,3065 1798.92,3585.48 1798.92,3605.89 RF_UART.3
UART_RX: RF_UART.2 SIGPORT.5 | length 885.3
  Top Layer w25: SIGPORT.5 1329.23,3165 1749.7,3585.48 1749.7,3605.89 RF_UART.2
UART_Tx: RF_UART.1 SIGPORT.7 | length 792.2
  Top Layer w25: SIGPORT.7 1375.94,3265 1701.18,3590.24 RF_UART.1
USB_DM: R33.2 U14.32 | length 142.5
  Top Layer w10: U14.32 2479.01,777.99 2528.58,827.56 R33.2
USB_DP: R34.2 U14.33 | length 305.4
  Top Layer w10: v1@2352.67,797.68 U14.33
  Top Layer w15: v1@2352.67,797.68 v1(2350.78,795.79) 2372.05,795.79
  Bottom Layer w15: v1(2350.78,795.79) 2437.16,795.79 2528.58,704.37 R34.2
VCC: C2.1 C.1 R2.1 SERIAL.4@2845,1762.17 U1.7 U1.8 | length 2273.3
  Top Layer w10: U1.7 1532.56,670.17 1548.26,670.17 1570.5,692.41 U1.8 1570.5,719.65 1569.44,720.72 1539.28,720.72 1495,765 1495,830 1555,890 R2.1
  Top Layer w40: R2.1 1560,900 1560,985 1605,1030 ; v1(1622.25,1012.75) 1605,1030 ; SERIAL.4@2845,1762.17 2462.83,1380 1978.6,1380 1803.6,1205 1780,1205 1605,1030
  Bottom Layer w40: C.1 1605,895 ; v1(1622.25,1012.75) 1605,995.5 1605,895 ; C2.1 1605,895
pads on no net: CAN2.0 CAN2.1 CAN2.2 RF_UART.0 RF_UART.4 SERIAL.0 SERIAL.4@1576.18,183.43 SIGPORT.1 U1.1 U1.2 U1.9 U1.11 U1.13 U1.14 U1.15 U1.16 U1.17 U1.18 U1.19 U1.20 U1.21 U1.22 U1.23 U1.27 U14.2 U14.3 U14.4 U14.11 U14.12 U14.13 U14.14 U14.16 U14.17 U14.18 U14.19 U14.28 U14.29 U14.38 U14.39 U14.40

## Polygon pours and split planes (outlines as drawn)
CAN1_H on Bottom Layer "AMMO_GND_Poly" (solid, pour order 15): 1975,3790 1985,3780 1985,3495 2150,3330 2405,3330 2405,3325 2545,3185 2545,2550 2580,2515 2740,2515 2780,2555 2780,3340 2675,3340 2540,3475 2540,3785
AMMO_DC on Bottom Layer "AMMO_GND_Poly" (solid, pour order 11): 155,535 705,535 1060,890 1055,895 1055,1090 645,1500 155,1500
GNDG on Bottom Layer "BOTTOMPOLYGON" (solid, pour order 7): 2950,1135 2015,1135 1785,905 1785,335 1790,335 2015,110 2015,0.25 2610,0.25 2610,370 2695,455 2700,450 2950,450
no net on Bottom Layer "HeaterH" (solid, shelved, pour order 4): 2950,1100
no net on Bottom Layer "HeaterH" (solid, shelved, pour order 1): 2950,1275
CAN1_L on Top Layer "AMMO_GND_Poly" (solid, pour order 16): 2075,3620 2475,3620 2775,3320 2775,2540 2740,2505 2570,2505 2535,2540 2545,2550 2545,3190 2530,3190 2395,3325 2155,3325 2155,3330 1985,3500 1985,3600
GMB_DC on Top Layer "AMMO_GND_Poly" (solid, pour order 10): 890,885 925,920 1005,920 1065,860 1065,170 880,170 875,175 875,865
AMMO_GND on Top Layer "AMMO_GND_Poly" (solid, pour order 8): 360,1425 360,625 430,625 790,985 790,1060 425,1425
GMB_GND on Top Layer "AMMO_GND_Poly" (solid, pour order 9): 825,925 865,885 865,170 725,170 660,235 665,240 665,880 710,925
GNDG on Top Layer "TOPPOLYGON" (solid, pour order 6): 2950,1135 2015,1135 1820,940 1820,305 2015,110 2015,0.25 2610,0.25 2610,370 2695,455 2700,450 2950,450

## Keep-outs
Keep-Out Layer:
  the board outline again, w0.5

## Other copper
Bottom Layer:
  pour cut-out: 2073.5,1033.45 2161.16,1033.45 2185,1009.61 2185,986.58 2164.45,966.02 2079.42,966.02 2068.5,976.94 2068.5,1033.07 2071.24,1035.82

## Silkscreen, mask and mechanical layers (free items; w line width, h text height)
Top Overlay:
  lines w2: 2062.5,1135 2062.5,1235 2562.5,1235 2562.5,1135 2062.5,1135
  lines w40: 2044.23,1761.1 2151.04,2008.07 2192.08,1924.31 ; 2185.31,1761.6 2291.17,2012.28 2400,1760 ; 2253.24,1790.43 2293.49,1697.98 2399.41,1952.12
  text "METAINFANTRY" at 2310,2190 h24 r90
  text "M  E  T  A      R  O  B  O  T  I  C  S" at 2355,2190 h20.5 r90
  text "META_ROBOTICS" at 2028.89,1618.68 h30
  text "INFANTRY_PCB_GROUP V2.0 / RELEASE DATE JUN16,2021" at 2020,1500 h17
  text "AUTHOR_QUOKECOLA" at 2025,1464 h24
  text "DIO" at 2375,1200 h25
  text "CLK" at 2475,1200 h25
  text "5V0" at 2075,1150 h25
  text "3V3" at 2175,1150 h25
  text "GND" at 2275,1150 h25
  text "SWIM" at 2365,1150 h25
  text "NRS" at 2475,1150 h25
  text "F103 DIO CLK GND" at 2405,1090 h12.5
  text "F103 Rx Tx Gnd" at 2455,335 h12.5
  text "3V3 RTS RXD TXD DTR GND" at 845,120 h25
Mechanical 1:
  the board outline again, w0.5

## Text inside footprints (layer, text, board x,y; h text height)
BOARD_P: Top Overlay "-" at 685,443 h30 r180; Bottom Overlay "-" at 665,443 h30 r180; Bottom Overlay "+" at 1057.11,629.24 h20 r180
FW_B_P: Top Overlay "-" at 540,1097 h30; Bottom Overlay "+" at 167.89,910.76 h20; Bottom Overlay "-" at 560,1097 h30
FW_T_P: Top Overlay "-" at 540,1397 h30; Bottom Overlay "-" at 560,1397 h30; Bottom Overlay "+" at 167.89,1210.76 h20
GM6020_P: Top Overlay "-" at 685,198 h30 r180; Bottom Overlay "-" at 665,198 h30 r180; Bottom Overlay "+" at 1057.11,384.24 h20 r180
M2006_P: Top Overlay "-" at 540,802 h30; Bottom Overlay "-" at 560,802 h30; Bottom Overlay "+" at 167.89,615.76 h20
SERIAL: Top Overlay "V" at 2766,1766.57 h30 r270; Top Overlay "G" at 2766,1495.57 h30 r270; Top Overlay "D+" at 2765,1597.57 h30 r270; Top Overlay "D-" at 2767,1683.57 h30 r270
STLINK: Top Overlay "D-" at 2767,844.83 h30 r270; Top Overlay "D+" at 2765,758.83 h30 r270; Top Overlay "G" at 2766,656.83 h30 r270; Top Overlay "V" at 2766,927.83 h30 r270